# Altium PCB LEDBO_LTSN-N213EGBW.PcbDoc
Units mil, origin at the board's own origin, x right, y up, seen from the top; angles counter-clockwise.
Board outline 2460.63 x 2460.63 mil, 2 copper layers (Top Layer, Bottom Layer), stack 62.8 mil thick; 64 components, 101 nets, 290 pads, 171 vias.
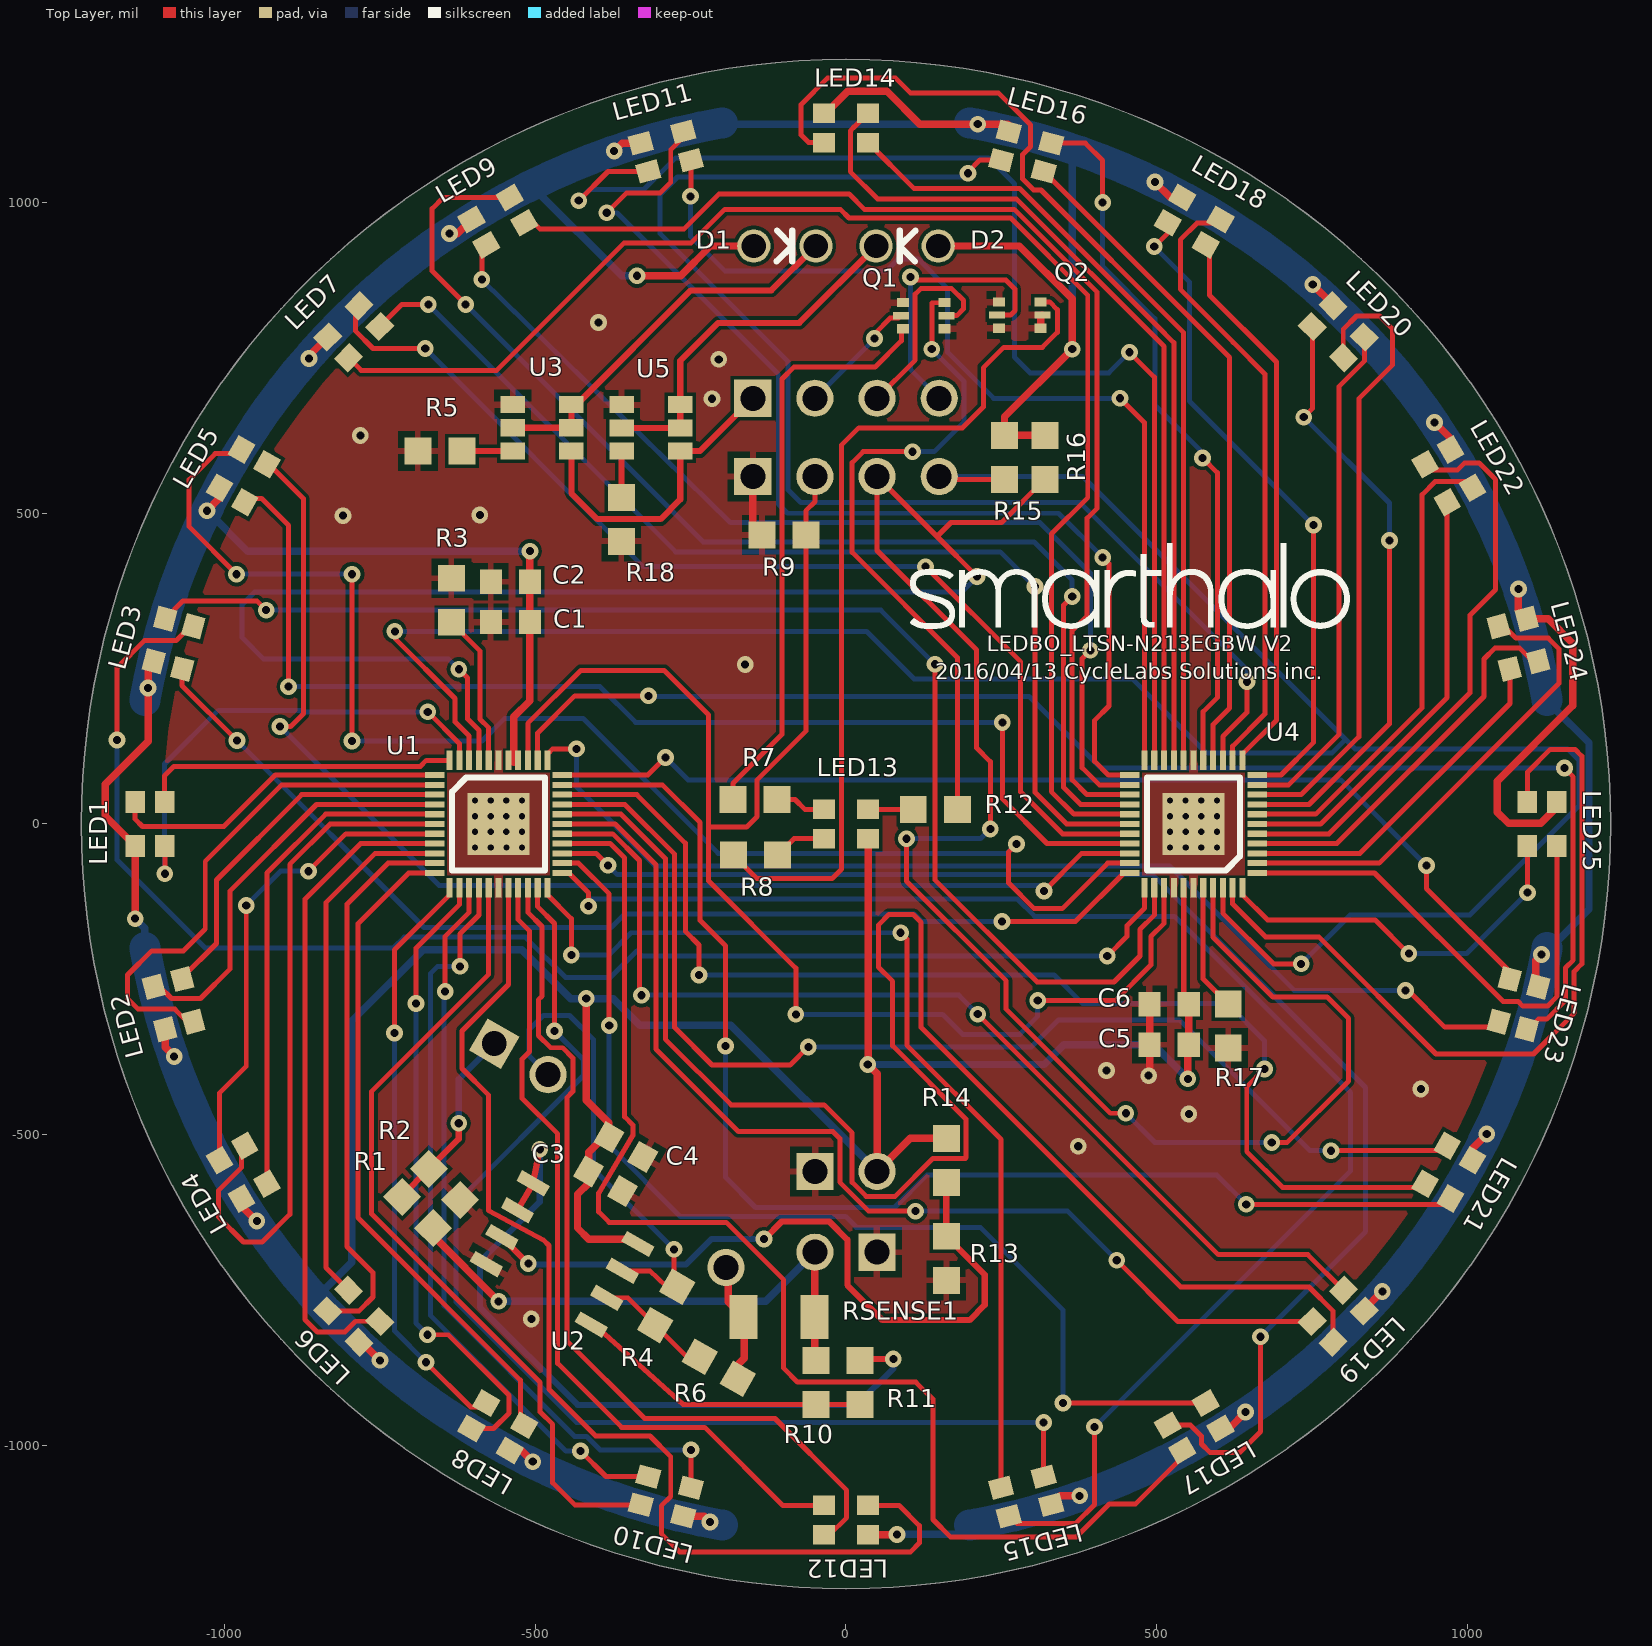
[diagram p0: Top Layer view]
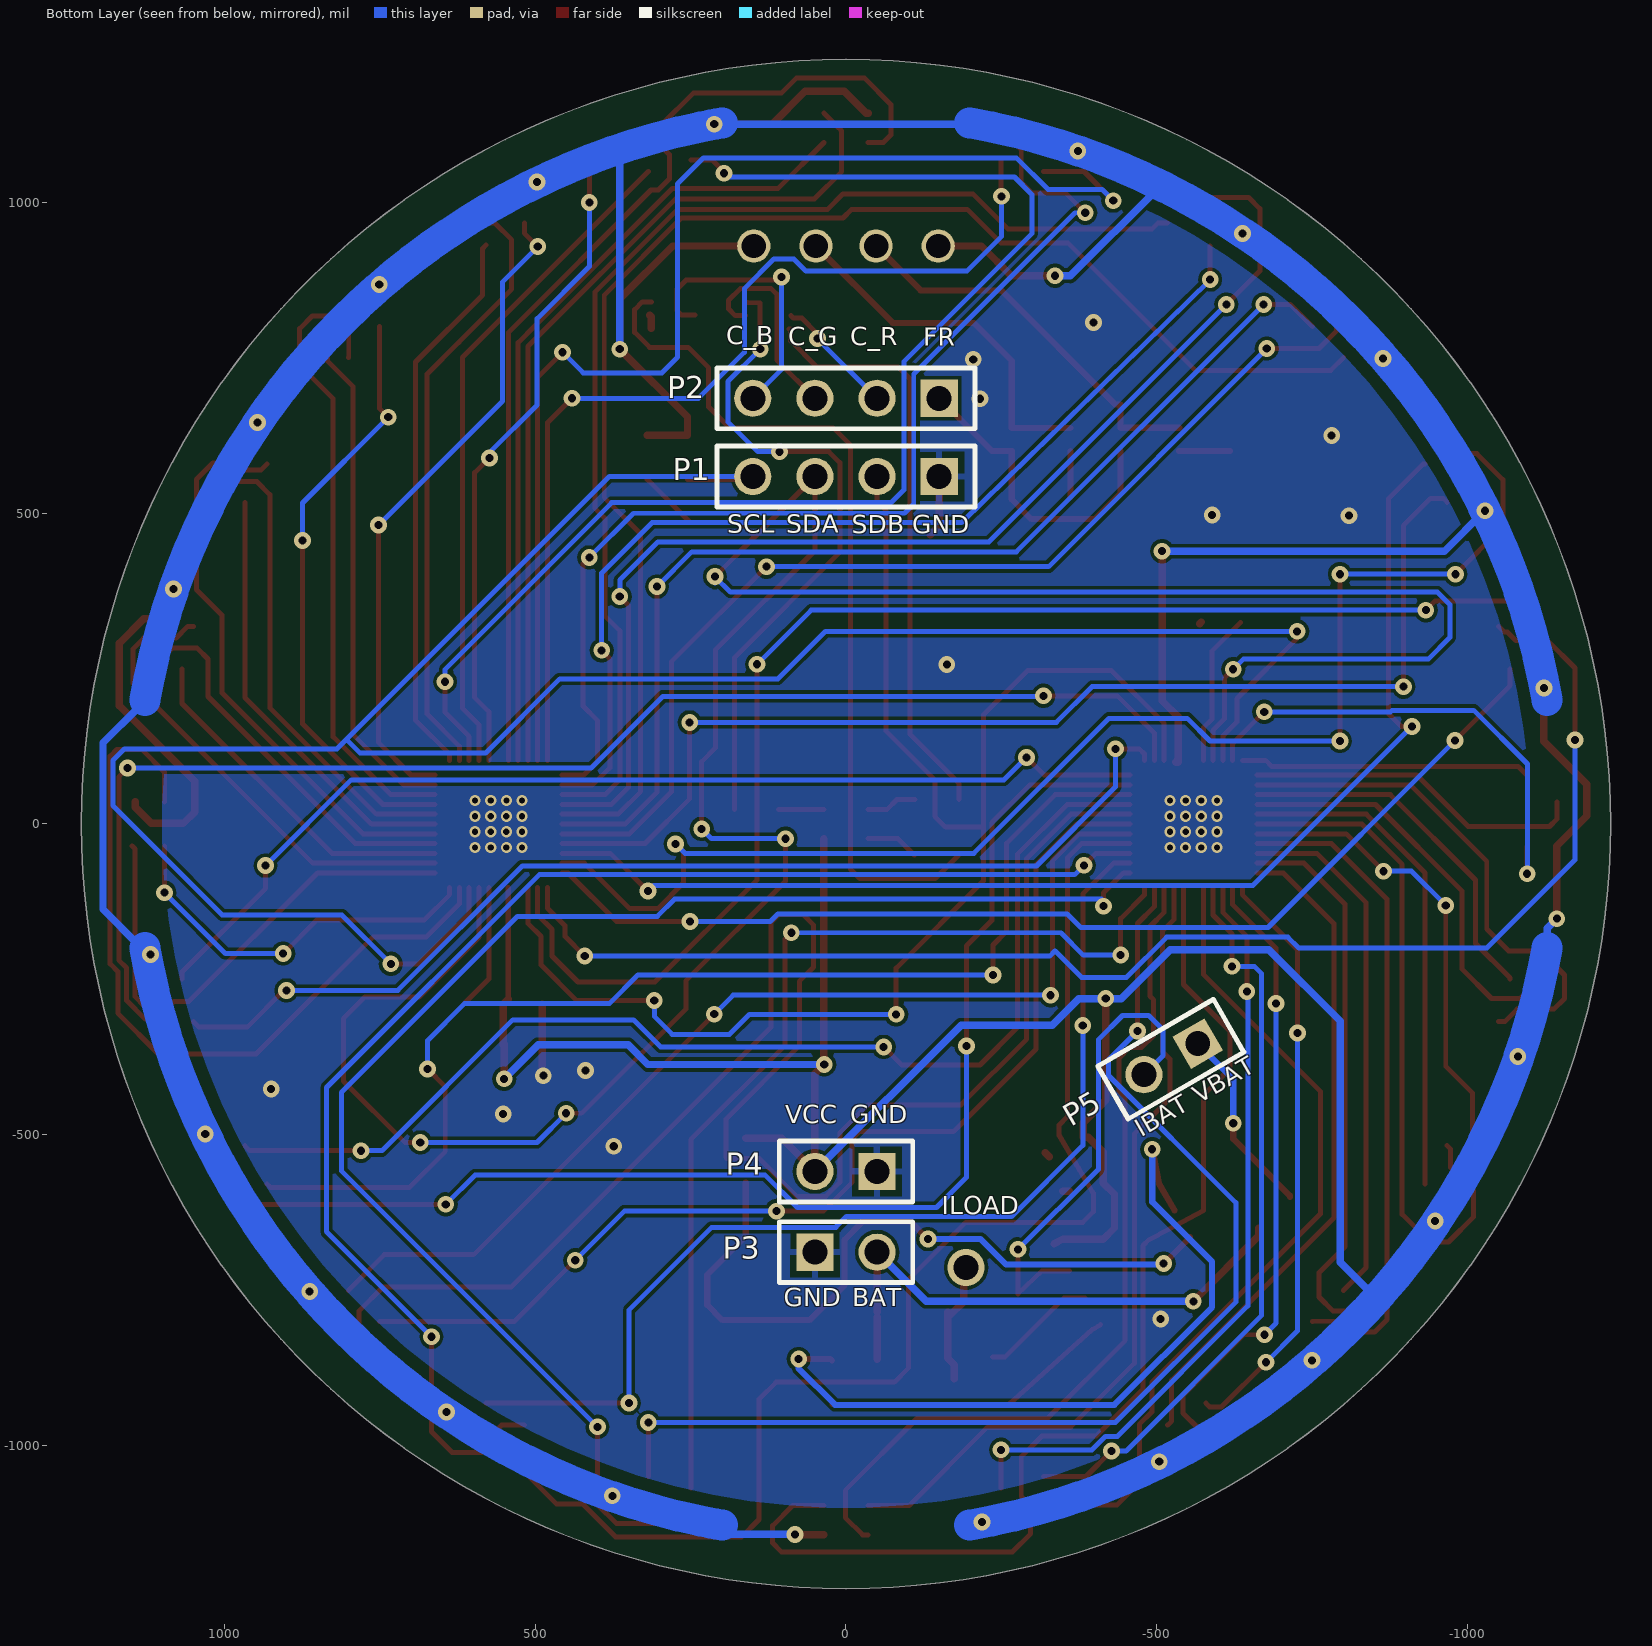
[diagram p1: Bottom Layer view, seen from below]

## Layer stack, top to bottom
Top Solder: solder mask 1, Solder Resist, Dk 3.5
Top Layer: signal copper 1.4
Dielectric 1: core 60, FR-4, Dk 4.2
Bottom Layer: signal copper 1.4
Bottom Solder: solder mask 1, Solder Resist, Dk 3.5

## Board outline
0,-1230.32 cw(c0,0) -1230.32,0 cw(c0,0) 0,1230.32 cw(c0,0) 1230.32,0 cw(c0,0)

## Design rules (kind name [scope] priority, off if disabled: settings)
AcuteAngle [All] p1: minimum=6.00000000000000E+0001 checktracksonly=FALSE
BoardOutlineClearance [All] p1: gap=15
Clearance Clearance_QFN [InComponent('U1') Or InComponent('U4')] p1: gap=4
Clearance [All] p2: gap=6
FanoutControl Fanout_LCC [IsLCC] p1: bgadir=Out bgaviamode=Centered fanoutstyle=Auto fanoutdirection=Alternating viagrid=1 // Fanout_LCC (Default Rule)
FanoutControl Fanout_BGA [IsBGA] p2: bgadir=Out bgaviamode=Centered fanoutstyle=Auto fanoutdirection=Alternating viagrid=1 // Fanout_BGA (Default Rule)
FanoutControl Fanout_Default [All] p4: bgadir=Out bgaviamode=Centered fanoutstyle=Auto fanoutdirection=Alternating viagrid=1 // Fanout_Default (Default Rule)
FanoutControl Fanout_Small [(CompPinCount < 5)] p5: bgadir=Out bgaviamode=Centered fanoutstyle=Auto fanoutdirection=OutThenIn viagrid=1 // Fanout_Small (Default Rule)
Height Height_TOP [OnLayer('Top Layer')] p2: minheight=0 maxheight=118.11 prefheight=39.37
Height Height_BOT [OnLayer('Bottom Layer')] p3: minheight=0 maxheight=787.4 prefheight=118.11
HoleSize [All] p1: absolutevalues=TRUE maxlimit=100 minlimit=10 maxpercent=80.000 minpercent=20.000
HoleToHoleClearance [All] p1: gap=6 allowstackedmicrovias=TRUE
MinimumAnnularRing [All] p1: minimumring=4
MinimumSolderMaskSliver [All] p1: minsoldermaskwidth=4
PolygonConnect PolygonConnect_Via_TP [IsVia Or (InComponent('U1') And IsPad) Or (InComponent('U4') And IsPad)] p1: connectstyle=Direct reliefconductorwidth=10 reliefentries=4 polygonreliefangle="90 Angle" airgapwidth=10
PolygonConnect [All] p2: connectstyle=Relief reliefconductorwidth=10 reliefentries=4 polygonreliefangle="90 Angle" airgapwidth=10
RoutingVias [All] p1: holewidth=13 width=27 viastyle="Through Hole" minholewidth=10 minwidth=18 maxholewidth=60 maxwidth=100
SilkToBoardRegionClearance SilkToBoardRegionClearance_1 [All] p2:
SolderMaskExpansion [All] p1: expansion=4
Width Width_VBAT [InNet('VBAT')] p1: maxlimit=50 minlimit=8 preferedwidth=12
Width Width_BATSENSE [InNet('BAT_SENSE')] p2: maxlimit=50 minlimit=8 preferedwidth=12
Width Width_VCC [InNet('VCC')] p3: maxlimit=50 minlimit=8 preferedwidth=12
Width Width_GND [InNet('GND')] p4: maxlimit=20 minlimit=8 preferedwidth=12
Width [All] p5: maxlimit=10 minlimit=6 preferedwidth=8
23 further rules are at their usual default settings.

## Classes and differential pairs
component class CENTRALLEDS: C3 C4 LED13 P3 P5 R1 R2 R4 R6 R10 R11 R13 R14 RSENSE1 U2
component class DRIVERS_CONNECTORS: C1 C2 C5 C6 D1 D2 P1 P2 P4 Q1 Q2 R3 R5 R7 R8 R9 R12 R15 R16 R17 R18 U1 U3 U4 U5
component class LEDS: LED1 LED2 LED3 LED4 LED5 LED6 LED7 LED8 LED9 LED10 LED11 LED12 LED14 LED15 LED16 LED17 LED18 LED19 LED20 LED21 LED22 LED23 LED24 LED25

## Components (designator, comment, footprint, x,y, rotation, side; value= is the part's Value field where it differs from the comment)
C1 "100.0nF" CAPC0603(1608)100_N -540,325 r180 top (schematic designator C4)
C2 "1.0uF" CAPC0603(1608)100_N -540,390 r180 top (schematic designator C3)
C3 "100.0nF" CAPC0603(1608)100_N -386.81,-574.8 r330 top (schematic designator C5)
C4 "1.0uF" CAPC0603(1608)100_N -354.33,-519.68 r330 top (schematic designator C6)
C5 "1.0uF" CAPC0603(1608)100_N 520,-355 r180 top (schematic designator C1)
C6 "100.0nF" CAPC0603(1608)100_N 520,-290 r180 top (schematic designator C2)
D1 "C503D-WAN-CDaEa232-0AH" FRONTLED_PADS -98.43,930 r0 top
D2 "C503D-WAN-CDaEa232-0AH" FRONTLED_PADS 98.43,930 r180 top
LED1 "LTSN-N213EGBW" LTSN-N213EGBW -1120.08,0 r0 top (schematic designator LED20)
LED2 "LTSN-N213EGBW" LTSN-N213EGBW -1081.91,-289.9 r15 top (schematic designator LED19)
LED3 "LTSN-N213EGBW" LTSN-N213EGBW -1081.91,289.9 r345 top (schematic designator LED21)
LED4 "LTSN-N213EGBW" LTSN-N213EGBW -970.02,-560.04 r30 top (schematic designator LED18)
LED5 "LTSN-N213EGBW" LTSN-N213EGBW -970.02,560.04 r330 top (schematic designator LED22)
LED6 "LTSN-N213EGBW" LTSN-N213EGBW -792.02,-792.02 r45 top (schematic designator LED17)
LED7 "LTSN-N213EGBW" LTSN-N213EGBW -792.02,792.02 r315 top (schematic designator LED23)
LED8 "LTSN-N213EGBW" LTSN-N213EGBW -560.04,-970.02 r60 top (schematic designator LED16)
LED9 "LTSN-N213EGBW" LTSN-N213EGBW -560.04,970.02 r300 top (schematic designator LED24)
LED10 "LTSN-N213EGBW" LTSN-N213EGBW -289.9,-1081.91 r75 top (schematic designator LED15)
LED11 "LTSN-N213EGBW" LTSN-N213EGBW -289.9,1081.91 r285 top (schematic designator LED25)
LED12 "LTSN-N213EGBW" LTSN-N213EGBW 0,-1120.08 r90 top (schematic designator LED14)
LED13 "LTSN-N213EGBW" LTSN-N213EGBW 0,0 r90 top (schematic designator LED1)
LED14 "LTSN-N213EGBW" LTSN-N213EGBW 0,1120.08 r270 top (schematic designator LED2)
LED15 "LTSN-N213EGBW" LTSN-N213EGBW 289.9,-1081.91 r105 top (schematic designator LED13)
LED16 "LTSN-N213EGBW" LTSN-N213EGBW 289.9,1081.91 r255 top (schematic designator LED3)
LED17 "LTSN-N213EGBW" LTSN-N213EGBW 560.04,-970.02 r120 top (schematic designator LED12)
LED18 "LTSN-N213EGBW" LTSN-N213EGBW 560.04,970.02 r240 top (schematic designator LED4)
LED19 "LTSN-N213EGBW" LTSN-N213EGBW 792.02,-792.02 r135 top (schematic designator LED11)
LED20 "LTSN-N213EGBW" LTSN-N213EGBW 792.02,792.02 r225 top (schematic designator LED5)
LED21 "LTSN-N213EGBW" LTSN-N213EGBW 970.02,-560.04 r150 top (schematic designator LED10)
LED22 "LTSN-N213EGBW" LTSN-N213EGBW 970.02,560.04 r210 top (schematic designator LED6)
LED23 "LTSN-N213EGBW" LTSN-N213EGBW 1081.91,-289.9 r165 top (schematic designator LED9)
LED24 "LTSN-N213EGBW" LTSN-N213EGBW 1081.91,289.9 r195 top (schematic designator LED7)
LED25 "LTSN-N213EGBW" LTSN-N213EGBW 1120.08,0 r180 top (schematic designator LED8)
P1 "MTLW-104-07-L-S-125" SMTC-MTLW-104-07-X-S-125 -150,559.05 r0 bottom locked
P2 "MTLW-104-07-L-S-125" SMTC-MTLW-104-07-X-S-125 -150,685 r0 bottom locked
P3 "MTLW-102-05-G-S-172" SMTC-MTLW-102-05-X-S-172 50,-688.98 r180 bottom locked
P4 "MTLW-102-05-G-S-172" SMTC-MTLW-102-05-X-S-172 -50,-559.05 r0 bottom locked
P5 "MTLW-102-05-G-S-172" SMTC-MTLW-102-05-X-S-172 -565.95,-353.35 r330 bottom locked
Q1 "NX3020NAKV" SOT666 125,817.91 r0 top
Q2 "NX3020NAKV" SOT666 279.53,818.9 r0 top
R1 "100kOhm" RESC0603(1608)_M -689.3,-625.2 r315 top (schematic designator R9)
R2 "300kOhm" RESC0603(1608)_M -646.1,-579.9 r135 top (schematic designator R10)
R3 "3.3 kOhm" RESC0603(1608)_M -635,360 r90 top (schematic designator R2)
R4 "1.1MOhm" RESC0603(1608)_M -289.37,-775.59 r240 top (schematic designator R17)
R5 "68 Ohm" RESC0603(1608)_M -653.5,600.3 r0 top (schematic designator R8)
R6 "10kOhm" RESC0603(1608)_M -204.72,-875 r330 top (schematic designator R16)
R7 "62 Ohm" RESC0603(1608)_M -146.65,39.37 r0 top (schematic designator R4)
R8 "62 Ohm" RESC0603(1608)_M -145.67,-50.2 r0 top (schematic designator R7)
R9 "100 kOhm" RESC0603(1608)_M -100,465 r0 top (schematic designator R11)
R10 "10kOhm" RESC0603(1608)_M -48.23,-898.62 r90 top (schematic designator R15)
R11 "1.1MOhm" RESC0603(1608)_M 22.64,-898.62 r90 top (schematic designator R14)
R12 "130 Ohm" RESC0603(1608)_M 143.7,23.62 r180 top (schematic designator R6)
R13 "100kOhm" RESC0603(1608)_M 161.42,-698.82 r90 top
R14 "100kOhm" RESC0603(1608)_M 161.42,-541.34 r90 top (schematic designator R12)
R15 "4.7 kOhm" RESC0603(1608)_M 255,590 r90 top (schematic designator R3)
R16 "4.7 kOhm" RESC0603(1608)_M 320,590 r90 top (schematic designator R5)
R17 "3.3 kOhm" RESC0603(1608)_M 615,-325 r270 top (schematic designator R1)
R18 "68 Ohm" RESC0603(1608)_M -361.5,490.2 r90 top
RSENSE1 "0.01 Ohm" RESC1206(3216)_N -107.6,-793.2 r0 top
U1 "IS31FL3236-QFLS2-TR" QFN-44 -559.05,0 r0 top locked
U2 "TSV358AIDT" "SOP8 - ST" -456.69,-691.93 r330 top locked
U3 "IS31LT3171" SOT23-6 -489,637.6 r90 top
U4 "IS31FL3236-QFLS2-TR" QFN-44 559.05,0 r180 top locked
U5 "IS31LT3171" SOT23-6 -313.8,637.4 r90 top

## Footprints (in the part's own frame and the unit in brackets; to place one, negate y for a bottom-side part, rotate by r counter-clockwise, add the part's x,y. Pads: shape width x height; smd on the part's side, far side on the other; paste and mask are expansions set on the pad)
CAPC0603(1608)100_N [mm] "Chip Capacitor, Body 1.6x0.8mm, Height 1.0mm, IPC Medium Density"
  rect 0.9x1 smd: 1(-0.8,0) 2(0.8,0)
  body extent -0.87,-0.48 0.88,0.47, height 1
FRONTLED_PADS [mm] "Front Led pads"
  round 1.36 hole 1: 1(-1.27,0) 2(1.27,0)
  silkscreen extent -0.34,-0.64 0.3,0.64
LTSN-N213EGBW [mm] "SMD LED LiteOn LTSN-N213EGBW, 2.1 x 2.1 mm, 1.2 x 1.8mm pitch"
  rect 0.8x0.9 smd: 1(-0.6,-0.9) 2(0.6,-0.9) 3(0.6,0.9) 4(-0.6,0.9)
  body extent -1.05,-1.05 1.05,1.05, height 1
QFN-44 [mm] "QFN-44, 5 x 5 x 0.8 mm body, 0.25 x 0.8 mm pads, 0.4 pin pitch, 2.55 x 2.55 mm thermal pad"
  rect 0.8x0.25 smd mask+0: 1(-2.6,2) 2(-2.6,1.6) 3(-2.6,1.2) 4(-2.6,0.8) 5(-2.6,0.4) 6(-2.6,0) 7(-2.6,-0.4) 8(-2.6,-0.8) 9(-2.6,-1.2) 10(-2.6,-1.6) 11(-2.6,-2) 23(2.6,-2) 24(2.6,-1.6) 25(2.6,-1.2) 26(2.6,-0.8) 27(2.6,-0.4) 28(2.6,0) 29(2.6,0.4) 30(2.6,0.8) 31(2.6,1.2) 32(2.6,1.6) 33(2.6,2)
  rect 0.25x0.8 smd mask+0: 12(-2,-2.6) 13(-1.6,-2.6) 14(-1.2,-2.6) 15(-0.8,-2.6) 16(-0.4,-2.6) 17(0,-2.6) 18(0.4,-2.6) 19(0.8,-2.6) 20(1.2,-2.6) 21(1.6,-2.6) 22(2,-2.6) 34(2,2.6) 35(1.6,2.6) 36(1.2,2.6) 37(0.8,2.6) 38(0.4,2.6) 39(0,2.6) 40(-0.4,2.6) 41(-0.8,2.6) 42(-1.2,2.6) 43(-1.6,2.6) 44(-2,2.6)
  rect 2.55x2.55 smd: 45(0,0)
  silkscreen extent -1.9,-1.9 1.9,1.9, body extent -2.5,-2.5 2.5,2.5, height 0.8
RESC0603(1608)_M [mm] "Chip Resistor, Body 1.6x0.8mm, IPC Low Density"
  rect 1.1x1.1 smd: 1(-0.9,0) 2(0.9,0)
  body extent -0.85,-0.47 0.85,0.47, height 0.6
RESC1206(3216)_N [mm] "Chip Resistor, Body 3.2x1.6mm, IPC Medium Density"
  rect 1.15x1.8 smd: 1(-1.45,0) 2(1.45,0)
  body extent -1.67,-0.87 1.67,0.87, height 0.75
SMTC-MTLW-102-05-X-S-172 [mm] "Terminal Assembly, 1x2 Pins, Vertical, 2.54mm Pitch, Male"
  rect 1.52x1.52 hole 1.02: 1(0,0)
  round 1.52 hole 1.02: 2(2.54,0)
  silkscreen extent -1.46,-1.24 4,1.24
SMTC-MTLW-104-07-X-S-125 [mm] "Terminal Assembly, 1x4 Pins, Vertical, 2.54mm Pitch, Male"
  rect 1.52x1.52 hole 1.02: 1(0,0)
  round 1.52 hole 1.02: 2(2.54,0) 3(5.08,0) 4(7.62,0)
  silkscreen extent -1.46,-1.24 9.08,1.24, body extent -1.27,-1.24 8.89,1.24, height 4.7
"SOP8 - ST" [mm] "SOP8, 3.9 x 4.9 x 1.75 mm body, 1.27mm x 4.95 mm pitch"
  rect 1.3x0.5 smd: 1(-2.475,1.905) 2(-2.475,0.635) 3(-2.475,-0.635) 4(-2.475,-1.905) 5(2.475,-1.905) 6(2.475,-0.635) 7(2.475,0.635) 8(2.475,1.905)
  body extent -2.45,-1.9 2.45,1.9, height 1.75
SOT23-6 [mm] "SOT23-6 pins, 2.92 x 1.6 mm body, 0.7mm x 1mm pads, 0.95 x 2.4 mm pitch"
  rect 0.7x1 smd mask+0.051: 1(-0.95,-1.2) 2(0,-1.2) 3(0.95,-1.2) 4(0.95,1.2) 5(0,1.2) 6(-0.95,1.2)
  body extent -1.56,-0.9 1.56,0.9, height 1.35
SOT666 [mm] "SOT666, 1.3 x 1.7 x 0.6 mm body, 0.375 x 0.5 mm pads, 1.6 x 0.538 mm pitch"
  rect 0.5x0.375 smd mask+0.046: 1(-0.85,0.538) 3(-0.85,-0.538) 4(0.85,-0.538) 6(0.85,0.538)
  rect 0.65x0.3 smd mask+0.046: 2(-0.925,0) 5(0.925,0)
  body extent -0.65,-0.85 0.65,0.85, height 0.6

## Part data
C1 C2 C3 C4 C5 C6: library part CAP0603, "Chip Cap 0603 X7R 10%"
D1 D2: "Cree 5mm Round LED C503D-WAN-CDaEa232-0AH"
LED1 LED2 LED3 LED4 LED5 LED6 LED7 LED8 LED9 LED10 LED11 LED12 LED13 LED14 LED15 LED16 LED17 LED18 LED19 LED20 LED21 LED22 LED23 LED24 LED25: "LED SMD LTSN-N213EGBW"
P1 P2: library part SMTC-MTLW-104-07-X-S-125, "Low Profile .025\" SQ Post Header, Through-hole, Vertical, -55 to 125 degC, 2.54 mm Pitch, 4-Pin, Male, RoHS"
P3 P4 P5: library part SMTC-MTLW-102-05-X-S-172, "Low Profile .025\" SQ Post Header, Through-hole, Vertical, -55 to 125 degC, 2.54 mm Pitch, 2-Pin, Male, RoHS"
Q1 Q2: "30 V, 200 mA dual N-channel Trench MOSFET"
R1 R13 R14: library part CMP-1012-00090-1, "100K 0.063W 1%  0603 (1608 Metric)  SMD"
R2: library part CMP-1012-00090-1, "300K 0.063W 1% 0603 (1608 Metric)  SMD"
R3 R17: library part CMP-1012-00090-1, "3k3 0.1W 5% 0603 (1608 Metric)  SMD"
R4 R11: library part CMP-1012-00090-1, "1M1 1/16W 1% 0603 (1608 Metric)  SMD"
R5 R18: library part CMP-1012-00090-1, "68R 0.1W 5% 0603 (1608 Metric)  SMD"
R6 R10: library part CMP-1012-00090-1, "10K 1/16W 1% 0603 (1608 Metric)  SMD"
R7 R8: library part CMP-1012-00090-1, "62R 0.1W 5% 0603 (1608 Metric)  SMD"
R9: library part CMP-1012-00090-1, "100k 0.1W 5% 0603 (1608 Metric)  SMD"
R12: library part CMP-1012-00090-1, "130R 0.1W 5% 0603 (1608 Metric)  SMD"
R15 R16: library part CMP-1012-00090-1, "4K7 0.1W 5% 0603 (1608 Metric)  SMD"
RSENSE1: library part RES1206(3216)_N, "0R01 0.25 W 1%  1206 (3216 Metric)  SMD"
U1 U4: "IC 36 CHANNELS LED DRIVER"
U2: "IC OPAMP GP 1.4MHZ RRO 8SO"
U3 U5: "10-TO-150MA CONSTANT-CURRENT LED DRIVER"

## Via types
v1: diameter 27, hole 13, Top Layer to Bottom Layer, tented top, 137 vias
v2: diameter 18, hole 10, Top Layer to Bottom Layer, 32 vias
v3: diameter 59.84, hole 40.16, Top Layer to Bottom Layer, 1 vias
v4: diameter 27, hole 13, Top Layer to Bottom Layer, 1 vias

## Nets (pads, with @x,y where several pads share a name; then routed paths per layer and width w, separated by ;. In a path a pad name is that pad's centre, name@x,y a point inside that pad or via, vN(x,y) a via of type N, cw(c..) or ccw(c..) an arc to the next point about the centre after c; other vN are vias at no path point)
BAT_SENSE: P3.2 R1.2 R10.2 RSENSE1.2 | length 866.5
  Top Layer w12: R1.2 -664.24,-662.86 -559.1,-768 v1(-558.9,-768) ; R10.2@-50.51,-860.9 RSENSE1.2 ; RSENSE1.2@-50,-784.64 P3.2
  Bottom Layer w12: v1(-558.9,-768) -129.02,-768 P3.2
CENTRAL_B: P2.4 Q2.2 | length 456.5
  Top Layer w8: v1(104,880) 108.58,875.42 257.08,875.42 272,860.5 272,825.9 265,818.9 Q2.2
  Bottom Layer w8: v1(104,880) 104,731 P2.4
CENTRAL_G: P2.3 Q1.5 | length 327.8
  Top Layer w8: P2.3 111.38,746.38 111.38,852.5 120.3,861.42 170.08,861.42 189,842.5 189,828.91 178,817.91 Q1.5
CENTRAL_R: P2.2 Q1.2 | length 198.3
  Top Layer w8: v1(46,781) 46,789 71.11,814.11 84.78,814.11 Q1.2
  Bottom Layer w8: P2.2 v1(46,781)
FRONTLED: P2.1 U3.1 U5.1 | length 502.8
  Top Layer w10: U3.1 -441.76,532.46 -399.9,490.6 -298.31,490.6 -266.56,522.36 U5.1 -235,600 P2.1
GND: C1.2 C2.2 C3.2 C4.2 C5.2 C6.2 P1.1 P3.1 P4.1 Q1.1 Q1.4 Q2.1 Q2.3 Q2.4 Q2.5 R2.1 R3.2 R5.1 R9.1 R13.1 R17.2 R18.1 U1.17 U1.39 U1.45 U2.4 U3.4 U4.17 U4.37 U4.39 U4.45 U5.4 | length 268.7
  Top Layer w12: C1.2 C1.2@-569.06,322.56 ; C3.2 C3.2@-348.55,-590.55 ; C4.2 C4.2@-320.62,-529 ; P1.1 -150,479.57 R9.1 ; P3.1@45.05,-684.02 P3.1 ; Q2.4 312.99,815.95 Q2.5 ; v1(487,-405) 488.5,-403.5 C6.2
  other v1: -506.3,-796.3 373.7,-518.5 551.6,-466.8 924.9,-426.5 419.2,-396.5 -162.2,256.8 -809.4,496.1 -589.2,497.1 -781.5,625.3 -215.7,684.2 -204.8,747.7 -398.2,806.8
  other v2: -596.77,-37.72 -571.63,-37.72 -546.48,-37.72 -521.34,-37.72 521.34,-37.72 546.5,-37.72 571.61,-37.72 596.77,-37.72 -596.77,-12.56 -571.61,-12.56 -546.5,-12.56 -521.34,-12.56 521.34,-12.56 546.5,-12.56 571.61,-12.56 596.77,-12.56 -596.77,12.56 -571.61,12.56 -546.5,12.56 -521.34,12.56 521.34,12.56 546.5,12.56 571.61,12.56 596.77,12.56 -596.77,37.72 -571.61,37.72 -546.5,37.72 -521.34,37.72 521.34,37.72 546.48,37.72 571.63,37.72 596.77,37.72
NetD1_2: D1.2 U3.2 U3.3 U3.5 | length 630.8
  Top Layer w10: U3.5 U3.2 U3.3 -433,675 -249.5,858.5 -119.93,858.5 D1.2
NetD2_2: D2.2 U5.2 U5.3 U5.5 | length 593.9
  Top Layer w10: U5.5 U5.2 U5.3 -266.56,745.34 -205.7,806.2 -75.37,806.2 D2.2
NetLED1_2: LED1.2 U1.43 | length 781
  Top Layer w8: LED1.2 -1096,-35.89 v1(-1096,-80) ; v1(-673,180.5) -622.05,129.55 U1.43
  Bottom Layer w8: v1(-1096,-80) -1096.46,-79.54 -1096.46,96.54 -1010,183 -878.8,183 -876.3,180.5 v1(-673,180.5)
NetLED1_3: LED1.3 U1.44 | length 511
  Top Layer w8: LED1.3 -1096.46,77.5 -1081.22,92.74 -684.76,92.74 -675.14,102.36 U1.44
NetLED1_4: LED1.4 U1.1 | length 549.1
  Top Layer w8: LED1.4 -1143.7,7.7 -1132,-4 -1001,-4 -918.26,78.74 U1.1
NetLED2_2: LED2.2 U1.2 | length 844.6
  Top Layer w8: LED2.2 -1059.99,-318.01 -1080,-298 -1139,-298 -1156,-281 -1156,-243 -1117,-204 -1066,-204 -1031,-169 -1031,-60 -908.01,62.99 U1.2
NetLED2_3: LED2.3 U1.3 | length 590.9
  Top Layer w8: LED2.3 -1068.27,-247.66 -1013,-192.39 -1013,-90 -875.76,47.24 U1.3
NetLED2_4: LED2.4 U1.4 | length 663.2
  Top Layer w8: LED2.4 -1104.21,-261.79 -1085.25,-280.75 -1038.75,-280.75 -991,-233 -991,-107.5 -852,31.5 U1.4
NetLED3_2: LED3.2 U4.33 | length 1759.8
  Top Layer w8: LED3.2 -1068.27,222.66 v1(-980.11,134.5) ; v1(251,-157) 369.1,-157 447.36,-78.74 U4.33
  Bottom Layer w8: v1(-980.11,134.5) -679.11,-166.5 -377.7,-166.5 -355.7,-144.5 109.5,-144.5 122,-157 v1(251,-157)
NetLED3_3: LED3.3 U4.34 | length 2302.2
  Top Layer w8: v1(-1173,135) -1173,251 -1129,295 -1078,295 -1064,309 -1058.94,309 LED3.3 ; v1(420.3,-212.6) 452.2,-180.7 452.2,-163.5 480.31,-135.39 U4.34
  Bottom Layer w8: v1(-1173,135) -1173,-57.6 -1031.1,-199.5 -728.5,-199.5 -711,-182 -516,-182 -451,-247 -379.2,-247 -336.2,-204 -327.6,-212.6 v1(420.3,-212.6)
NetLED3_4: LED3.4 U4.35 | length 2174.7
  Top Layer w8: LED3.4 -1066.8,359 -948,359 v1(-933,344) ; v1(143,257) 143,-89.8 307.5,-254.3 431.3,-254.3 473.1,-212.5 473.1,-169.6 496.06,-146.64 U4.35
  Bottom Layer w8: v1(-933,344) 56,344 v1(143,257)
NetLED4_2: LED4.2 U1.5 | length 809.7
  Top Layer w8: LED4.2 -931.84,-78.84 -837.25,15.75 U1.5
NetLED4_3: LED4.3 U1.6 | length 1105.9
  Top Layer w8: LED4.3 -973,-523.27 -973,-553 -1010,-590 -1010,-632 -969.5,-672.5 -939.5,-672.5 -895,-628 -895,-65 -830,0 U1.6
NetLED4_4: LED4.4 U1.7 | length 779.4
  Top Layer w8: LED4.4 -1008.19,-433.19 -965,-390 v1(-965,-131) ; v1(-865,-76) -804.75,-15.75 U1.7
  Bottom Layer w8: v1(-965,-131) -910,-76 v1(-865,-76)
NetLED5_2: LED5.2 U4.30 | length 1880.9
  Top Layer w8: LED5.2 -960.82,524 -940.39,524 -897,480.61 v1(-897,221) ; v1(251.5,163.5) 251.5,40.5 323.5,-31.5 U4.30
  Bottom Layer w8: v1(-897,221) -395.9,221 -338.4,163.5 v1(251.5,163.5)
NetLED5_3: LED5.3 U4.31 | length 1975.9
  Top Layer w8: LED5.3 -928.44,578.91 -873,523.48 -873,177.5 -893.5,157 v1(-910.5,157) ; v1(318.5,-108) 379.26,-47.24 U4.31
  Bottom Layer w8: v1(-910.5,157) -654.5,-99 309.5,-99 v1(318.5,-108)
NetLED5_4: LED5.4 U4.32 | length 2233.6
  Top Layer w8: v1(-980.6,401.9) -1057,478.3 -1057,554 -1015,596 -979.29,596 LED5.4 ; v1(-794.7,133.5) v1(-794.7,401.9) ; v1(274.3,-32) 261.6,-44.7 261.6,-95 302.8,-136.2 347.9,-136.2 421.11,-62.99 U4.32
  Bottom Layer w8: v1(-980.6,401.9) v1(-794.7,401.9) ; v1(-794.7,133.5) -585.6,133.5 -549,170.1 -423.1,170.1 -205.8,-47.2 259.1,-47.2 v1(274.3,-32)
NetLED6_2: LED6.2 U1.8 | length 1058.3
  Top Layer w8: LED6.2 -750.51,-800.11 -789.2,-800.11 -806.41,-817.33 -850.67,-817.33 -870.5,-797.5 -870.5,-121 -781,-31.5 U1.8
NetLED6_3: LED6.3 U1.9 | length 847.3
  Top Layer w8: LED6.3 -837,-713.62 -837,-126.6 -757.64,-47.24 U1.9
NetLED6_4: LED6.4 U1.10 | length 900.8
  Top Layer w8: LED6.4 -833.77,-783.92 -783.92,-783.92 -761,-761 -761,-722 -803,-680 -803,-129 -736.99,-62.99 U1.10
NetLED7_2: LED7.2 U4.27 | length 2326.6
  Top Layer w8: LED7.2 -780.11,730 -562,730 -357,935 -249,935 -195,989 -9,989 4.9,975.1 264.9,975.1 389,851 389,525 330.5,466.5 330.5,52 366.75,15.75 U4.27
NetLED7_3: LED7.3 U4.28 | length 1761.9
  Top Layer w8: LED7.3 -714.62,836 v1(-672,836) ; v1(304,382) 304,51 355,0 U4.28
  Bottom Layer w8: v1(-672,836) -274,438 248,438 v1(304,382)
NetLED7_4: LED7.4 U4.29 | length 1746.4
  Top Layer w8: LED7.4 -789,828.44 -789,793 -761,765 v1(-677,765) ; v1(128,414) 281,261 281,51.5 348.25,-15.75 U4.29
  Bottom Layer w8: v1(-677,765) -326,414 v1(128,414)
NetLED8_2: LED8.2 U1.11 | length 1075.6
  Top Layer w8: U1.11 -703.74,-78.74 -785.3,-160.3 -785.3,-633.55 -524,-894.85 -524,-960.82 LED8.2
NetLED8_3: LED8.3 U1.12 | length 950.8
  Top Layer w8: v1(-726.6,-336.1) -726.6,-202.4 -637.8,-113.6 U1.12 ; v1(-676,-866) -604,-938 -585.07,-938 LED8.3
  Bottom Layer w8: v1(-726.6,-336.1) -726.6,-815.4 v1(-676,-866)
NetLED8_4: LED8.4 U1.13 | length 1029
  Top Layer w8: v1(-691.9,-289) -691.9,-199.8 -622.05,-129.95 U1.13 ; v1(-673.4,-821.8) -639.8,-821.8 -542,-919.6 -542,-947.63 -567.13,-972.76 LED8.4
  Bottom Layer w8: v1@-691.9,-286.9 -691.9,-803.3 v1(-673.4,-821.8)
NetLED9_2: LED9.2 U4.24 | length 1632.7
  Top Layer w8: v1(-585.91,875.91) LED9.2@-585.91,929.84 ; v1(393.1,279.4) 380.06,266.36 380.06,90.44 407.51,62.99 U4.24
  Bottom Layer w8: v1(-585.91,875.91) -186,485 312,485 393.1,403.9 v1(393.1,279.4)
NetLED9_3: LED9.3 U4.25 | length 1918.8
  Top Layer w8: LED9.3 -502.28,967.28 -492,957 -261,957 -204,1014 4.73,1014 29.63,989.1 270.7,989.1 404,855.8 404,508 388,492 388,335 364,311 364,71 387.76,47.24 U4.25
NetLED9_4: LED9.4 U4.26 | length 1925.6
  Top Layer w8: v1(-612,836) -665.81,889.81 -665.81,990 -647.62,1008.19 LED9.4 ; v1(364,366) 350,352 350,59 377.5,31.5 U4.26
  Bottom Layer w8: v1(-612,836) -230,454 302.5,454 364,392.5 v1(364,366)
NetLED10_2: LED10.2 U1.14 | length 1244
  Top Layer w8: v1(-644.9,-269.7) -644.9,-180.84 -606.3,-142.24 U1.14 ; LED10.2 v1(-249.56,-1007)
  Bottom Layer w8: v1(-644.9,-269.7) -646.6,-271.4 -646.6,-775.4 -436.5,-985.5 -417.27,-985.5 -395.77,-1007 v1(-249.56,-1007)
NetLED10_3: LED10.3 U1.15 | length 1199.6
  Top Layer w8: v1(-621.1,-229) -621.1,-176.84 -590.55,-146.29 U1.15 ; v1(-427,-1009) -386.07,-1049.93 LED10.3
  Bottom Layer w8: v1(-621.1,-229) -657.1,-229 -668.4,-240.3 -668.4,-791 -450.4,-1009 v1(-427,-1009)
NetLED10_4: LED10.4 U1.16 | length 1312.7
  Top Layer w8: U1.16@-575.06,-102.36 -575.06,-241.96 -763.2,-430.1 -763.2,-627.4 -492,-898.6 -492,-946 -472,-966 -472,-1060 -436.44,-1095.56 LED10.4
NetLED11_2: LED11.2 U4.21 | length 2039.6
  Top Layer w8: v1(-430,1003) -383.07,1049.93 LED11.2 ; v1(456,759) 496.06,718.94 U4.21
  Bottom Layer w8: v1(-430,1003) -412.2,1020.8 -325.2,1020.8 -274.2,1071.8 229.3,1071.8 271,1030.1 271,751 296,726 423,726 v1(456,759)
NetLED11_3: LED11.3 U4.22 | length 1603.4
  Top Layer w8: v1(-250,1010) -250,1007.38 -249.56,1006.94 LED11.3 ; v1(441,685) 480.31,645.69 U4.22
  Bottom Layer w8: v1(-250,1010) -250,945 -194.48,889.48 64.48,889.48 84,909 116,909 163.65,861.35 163.65,758.85 237.5,685 v1(441,685)
NetLED11_4: LED11.4 U4.23 | length 1771
  Top Layer w8: v1(-385,983.5) -353.5,1015 -299.5,1015 -282,1032.5 -282,1085 -261.79,1105.21 LED11.4 ; v1(413,429) 423.1,418.9 423.1,189.9 400,166.8 400,100.8 422.06,78.74 U4.23
  Bottom Layer w8: v1(-385,983.5) -368.5,983.5 -109,724 -109,515 -94,500 342,500 v1(413,429)
NetLED12_2: LED12.2 U1.18 | length 1840.3
  Top Layer w8: U1.18@-543.06,-102.36 -543.06,-258.26 -617.9,-333.1 -617.9,-393.4 -575,-436.3 -575,-622 -486.53,-669.6 -478,-678.13 -478,-909.5 -402.81,-984.69 -315.31,-984.69 -282,-1018 -282,-1082 -297,-1097 -297,-1142 -268,-1171 104,-1171 118,-1157 118,-1129 85.46,-1096.46 LED12.2
NetLED12_3: LED12.3 U1.19 | length 1324.9
  Top Layer w8: U1.19 -527.56,-153.94 -509.06,-172.44 -509.06,-366.06 -521,-378 -521,-441.6 -464,-498.6 -464,-867.7 -361.01,-970.69 -227.31,-970.69 -101.54,-1096.46 LED12.3
NetLED12_4: LED12.4 U1.20 | length 1421.1
  Top Layer w8: U1.20 -511.81,-142.24 -489.06,-165 -489.06,-277.06 -495,-283 -495,-340.23 -475.23,-360 -456,-360 -439.42,-376.58 -439.42,-430.42 -449.27,-440.27 -449.27,-831.33 -323.91,-956.69 -114.31,-956.69 1,-1072 1,-1116 -26.7,-1143.7 LED12.4
NetLED13_2: LED13.2 R12.2 | length 72.8
  Top Layer w8: LED13.2 R12.2
NetLED13_3: LED13.3 R7.2 | length 82.3
  Top Layer w8: R7.2 -82,39.37 -66.25,23.62 LED13.3
NetLED13_4: LED13.4 R8.2 | length 85.8
  Top Layer w8: R8.2 -83.66,-23.62 LED13.4
NetLED14_2: LED14.2 U4.18 | length 1651.2
  Top Layer w8: LED14.2 -60,1096.46 -72.5,1108.96 -72.5,1157.5 -30,1200 80,1200 104,1176 245.64,1176 297,1124.64 297,1090 284,1077 284,1037.98 301.85,1020.13 313.87,1020.13 543.31,790.69 U4.18
NetLED14_3: LED14.3 U4.19 | length 1297.6
  Top Layer w8: LED14.3 108.99,1022.9 279.1,1022.9 500.39,801.61 527.56,774.44 U4.19
NetLED14_4: LED14.4 U4.20 | length 1393.4
  Top Layer w8: LED14.4 13.94,1122.21 13.58,1122.21 7.72,1116.35 7.72,1115.99 7,1115.27 7,1049.5 50.7,1005.8 274.2,1005.8 511.81,768.19 U4.20
NetLED15_2: LED15.2 U1.21 | length 1894.6
  Top Layer w8: U1.21 -496.06,-133.04 -469.06,-160.04 -469.06,-332.94 v1(-469,-333) ; LED15.2 v1(318.01,-963)
  Bottom Layer w8: v1(-469,-333) -422.5,-379.5 -422.5,-404.6 -627.2,-609.3 -627.2,-769.3 -433.5,-963 v1(318.01,-963)
NetLED15_3: LED15.3 U1.22 | length 1629.6
  Top Layer w8: U1.22 -480.31,-113.98 -442,-152.3 v1(-442,-211) ; v1(88,-175) 98,-185 98,-355.99 249.56,-507.55 LED15.3
  Bottom Layer w8: v1(-442,-211) -382,-211 -346,-175 v1(88,-175)
NetLED15_4: LED15.4 U1.23 | length 2430.7
  Top Layer w8: U1.23 -446.36,-78.74 -414.4,-110.7 v1(-414.4,-132.2) ; LED15.4 263.59,-1113.9 275.04,-1125.36 369.64,-1125.36 400,-1095 v1(400,-970)
  Bottom Layer w8: v1(-414.4,-132.2) -414.4,-124.2 -411.2,-121 276,-121 303.6,-148.6 528.6,-148.6 811.9,-431.9 811.9,-558.1 v1(400,-970)
NetLED16_2: LED16.2 U4.14 | length 2153.9
  Top Layer w8: v1(196.5,1047.1) 196.5,1049.5 215.27,1068.27 LED16.2 ; U4.14 606.3,140.7 645,179.4 v1(645,228.9)
  Bottom Layer w8: v1(196.5,1047.1) 190.4,1041 -271,1041 -299,1013 -299,950 -93,744 -93,537.5 -72.5,517 377,517 645,249 v1(645,228.9)
NetLED16_3: LED16.3 U4.15 | length 1082.4
  Top Layer w8: LED16.3 617.1,750.84 617.1,186.3 590.55,159.75 U4.15
NetLED16_4: LED16.4 U4.16 | length 1145.9
  Top Layer w8: LED16.4 385,1095.56 413,1067.56 v1(413,1000) ; v1(573.6,589.1) 597.4,565.3 597.4,203.4 574.8,180.8 U4.16
  Bottom Layer w8: v1(413,1000) 413,897 497,813 497,674.2 574.8,596.4 v1(573.6,589.1)
NetLED17_2: LED17.2 U1.24 | length 1752.9
  Top Layer w8: U1.24 -430.51,-62.99 -381,-112.5 v1(-381,-324) ; v1(349.34,-931.84) LED17.2
  Bottom Layer w8: -381,-356 v1(-381,-324) -381,-517 -266.5,-631.5 -0.63,-631.5 16.87,-649 ; 15.94,-649.05 216.05,-649.05 349.34,-782.34 v1(349.34,-931.84)
NetLED17_3: LED17.3 U1.25 | length 2261.3
  Top Layer w8: U1.25 -402.16,-47.24 v1(-382.9,-66.5) ; LED17.3 554.28,-967.28 572,-985 572,-997.5 585.5,-1011 633.9,-1011 667,-977.9 v1(667,-825)
  Bottom Layer w8: v1(-382.9,-66.5) -367.9,-81.5 493.5,-81.5 836,-424 836,-656 v1(667,-825)
NetLED17_4: LED17.4 U1.26 | length 2116.2
  Top Layer w8: U1.26 -379.4,-31.5 -356.1,-54.8 -356.1,-471.3 -343,-484.4 -343,-501 -398,-594 -398,-624 -381,-641 -192.7,-641 -100.3,-733.4 -100.3,-875.7 -78,-898 112.5,-898 140,-925.5 140,-1119 168,-1147 371,-1147 424,-1094 466,-1094 541.16,-1018.84 LED17.4
NetLED18_2: LED18.2 U4.11 | length 1063.5
  Top Layer w8: v1(496,929) 517.54,950.54 LED18.2 ; U4.11 699.84,78.74 752,130.9 v1(752,481)
  Bottom Layer w8: v1(496,929) 552.5,872.5 552.5,680.5 v1(752,481)
NetLED18_3: LED18.3 U4.12 | length 899.3
  Top Layer w8: LED18.3 585,925.76 585,850.91 692.6,743.31 692.6,166.9 637.8,112.1 U4.12
NetLED18_4: LED18.4 U4.13 | length 993.7
  Top Layer w8: LED18.4 596.78,967 565,967 538,940 538,860.47 623.06,775.41 623.06,774.94 674.1,723.9 674.1,177.3 622.05,125.25 U4.13
NetLED19_2: LED19.2 U1.27 | length 1686.4
  Top Layer w8: U1.27 -375.35,-15.75 -332.25,-58.85 -332.25,-272.35 v1(-329.1,-275.5) ; v1(212,-306) 599,-693 743.11,-693 LED19.2
  Bottom Layer w8: v1(-329.1,-275.5) 181.5,-275.5 v1(212,-306)
NetLED19_3: LED19.3 U1.28 | length 1753.5
  Top Layer w8: U1.28 -371.3,0 -305.6,-65.7 -305.6,-362.4 -173,-495 -21,-495 -10,-506 -10,-576.43 36.57,-623 v1(112,-623) ; v1(435.63,-702) 534,-800.37 LED19.3
  Bottom Layer w8: v1(112,-623) 356.63,-623 v1(435.63,-702)
NetLED19_4: LED19.4 U1.29 | length 2732.4
  Top Layer w8: U1.29 -361.95,15.75 -290.6,-55.6 -290.6,-346.3 -184.9,-452 -35,-452 10,-497 10,-576.63 32.37,-599 79,-599 140,-538 192.07,-538 193.07,-537 193.07,-475 75,-356.93 75,-253 52,-230 52,-162.7 69.3,-145.4 107.9,-145.4 121,-158.5 121,-327.5 538.5,-745 745,-745 783.92,-783.92 783.92,-833.77 LED19.4
NetLED20_2: LED20.2 U4.8 | length 968.9
  Top Layer w8: U4.8 744.9,31.5 874.5,161.1 v1(874.5,456.3) ; v1(736.5,654.6) 750.26,668.36 LED20.2
  Bottom Layer w8: v1(736.5,654.6) 874.5,516.6 v1(874.5,456.3)
NetLED20_3: LED20.3 U4.9 | length 1023.5
  Top Layer w8: U4.9 732.14,47.24 825.1,140.2 825.1,684.4 879.1,738.4 879.1,796.9 858.67,817.33 821.33,817.33 800.11,796.11 800.11,750.51 LED20.3
NetLED20_4: LED20.4 U4.10 | length 827.2
  Top Layer w8: U4.10 712.39,62.99 793,143.6 793,703.69 834.03,744.72 834.03,771.27 827.83,777.47 LED20.4@834.03,783.66
NetLED21_2: LED21.2 U1.30 | length 1881.9
  Top Layer w8: U1.30 -355.8,31.5 -275.8,-48.5 -275.8,-327.5 -215.5,-387.8 -89.8,-387.8 v1(-60.6,-358.6) ; v1(780.3,-525.7) 959.12,-525.7 LED21.2
  Bottom Layer w8: v1(-60.6,-358.6) 298.4,-358.6 342,-315 536,-315 746.7,-525.7 v1(780.3,-525.7)
NetLED21_3: LED21.3 U1.31 | length 1909.5
  Top Layer w8: U1.31 -336.64,47.24 -258.5,-30.9 -258.5,-172.8 -236.6,-194.7 v1(-236.6,-242.8) ; v1(673.5,-394) 644.8,-422.7 644.8,-527.1 702.7,-585 925.76,-585 LED21.3
  Bottom Layer w8: v1(-236.6,-242.8) 334.6,-242.8 380.8,-289 614,-289 673.5,-348.5 v1(673.5,-394)
NetLED21_4: LED21.4 U1.32 | length 2071.1
  Top Layer w8: U1.32 -295.39,62.99 -235,2.6 -235,-155 -193.7,-196.3 v1(-193.7,-357.3) ; v1(644,-612) 644.13,-612.13 963.16,-612.13 LED21.4 LED21.4@972.76,-607
  Bottom Layer w8: v1(-193.7,-357.3) -193.7,-568.8 -145.52,-616.98 78.02,-616.98 130,-565 597,-565 v1(644,-612)
NetLED22_2: LED22.2 U4.5 | length 929.9
  Top Layer w8: U4.5 777.19,-15.75 1004,211.06 1004,336 1045,377 1045,554.5 1018.5,581 995.33,581 983.65,569.32 941.44,569.32 LED22.2
NetLED22_3: LED22.3 U4.6 | length 704.2
  Top Layer w8: U4.6 763.76,0 967.28,203.52 LED22.3
NetLED22_4: LED22.4 U4.7 | length 769.6
  Top Layer w8: U4.7 755.75,15.75 927,187 927,529.96 947.8,550.76 998.6,550.76 LED22.4@999.36,550 ; LED22.4 LED22.4@1008.19,550
NetLED23_2: LED23.2 U1.33 | length 1712.8
  Top Layer w8: U1.33 -318.86,78.74 v1(-290.4,107.2) ; v1(934,-67) 934,-104 1068.27,-238.27 LED23.2
  Bottom Layer w8: v1(-290.4,107.2) -254.2,71 796,71 v1(934,-67)
NetLED23_3: LED23.3 U1.34 | length 1769.3
  Top Layer w8: U1.34 -480.31,112.69 -472.05,120.95 -472.1,121 v1(-433.5,121) ; v1(900.4,-267.7) 904.4,-267.7 963.6,-326.9 1041.04,-326.9 LED23.3
  Bottom Layer w8: v1(-433.5,121) -433.5,59.5 -306.5,-67.5 520.91,-67.5 721.11,-267.7 v1(900.4,-267.7)
NetLED23_4: LED23.4 U1.35 | length 2235.1
  Top Layer w8: U1.35 -496.06,146.48 -436.34,206.2 v1(-317.6,206.2) ; LED23.4 1106.8,-319 1109,-319 1114,-314 1127.44,-314 1157.7,-283.74 1157.7,-231.5 1170,-219.2 1170,76 v1(1156,90)
  Bottom Layer w8: v1(-317.6,206.2) -316.9,205.5 294.5,205.5 410,90 v1(1156,90)
NetLED24_2: LED24.2 U4.2 | length 773.3
  Top Layer w8: U4.2 858.01,-62.99 1147,226 1147,282 1130,299 1078,299 1058.99,318.01 LED24.2
NetLED24_3: LED24.3 U4.3 | length 562.4
  Top Layer w8: U4.3 827.07,-47.24 1068.27,193.96 LED24.3
NetLED24_4: LED24.4 U4.4 | length 629.4
  Top Layer w8: U4.4 789.8,-31.5 1026.52,205.22 1026.52,265.52 1044,283 1084,283 1105.21,261.79 LED24.4 LED24.4@1113.9,264.31
NetLED25_2: LED25.2 U4.43 | length 1277.2
  Top Layer w8: U4.43 622.05,-128.65 674.9,-181.5 760.7,-181.5 949.2,-370 1106.2,-370 1171.7,-304.5 1171.7,-237.3 1184,-225 1184,109.2 1173,120.2 1133.2,120.2 1096.46,83.46 LED25.2
NetLED25_3: LED25.3 U4.44 | length 624.9
  Top Layer w8: U4.44 637.8,-113.7 678.2,-154.1 851.2,-154.1 v1(905.6,-208.5) ; v1(1096.46,-110.54) LED25.3
  Bottom Layer w8: v1(905.6,-208.5) 998.5,-208.5 v1(1096.46,-110.54)
NetLED25_4: LED25.4 U4.1 | length 821.7
  Top Layer w8: U4.1 850.47,-78.74 1057.33,-285.6 1081.6,-285.6 1088.97,-292.97 1128.67,-292.97 1143.7,-277.95 1143.7,-40.24 LED25.4@1148.5,-35.43
NetP5_1: P5.1 R1.1 R2.2 | length 308.3
  Top Layer w10: R1.1 -714.35,-598.04 R2.2 -623.1,-506.79 v1(-623.1,-481.5)
  Bottom Layer w10: v1(-623.1,-481.5) -623.1,-410.5 P5.1
NetP5_2: P5.2 R4.1 U2.7 | length 775.6
  Top Layer w8: U2.7 -315.55,-719 -276.65,-756.04 v1(-276.65,-684.35)
  Bottom Layer w8: P5.2 -510,-372.69 -510,-331 -487,-308 -445,-308 -406,-347 -406,-556 v1(-276.65,-684.35)
NetQ1_3: Q1.3 R7.1 | length 948.7
  Top Layer w8: R7.1 -182.09,65.25 -103,144.34 -103,716 -84.01,734.99 46.65,734.99 89,777.34 89,796.73 Q1.3
NetQ1_6: Q1.6 R12.1 | length 1069.6
  Top Layer w8: v1(107,599) 27.5,599 10,581.5 10,437.13 179.13,268 R12.1 ; v1(138,764) 138,838.09 Q1.6
  Bottom Layer w8: v1(107,599) 142,599 190,647 190,712 v1(138,764) v1@137,765
NetQ2_6: Q2.6 R8.1 | length 1406.4
  Top Layer w8: R8.1 -143.3,-88 -22.5,-88 -7,-72.5 -7,610 20.5,637.5 187.5,637.5 221,671 221,734 254,767 316,767 340,791 340,827.68 327.61,840.08 Q2.6
NetR3_1: R3.1 U1.40 | length 247
  Top Layer w8: R3.1 -589.06,278.62 -589.06,169.05 -575.06,155.05 U1.40@-575.06,102.36
NetR4_2: R4.2 R6.1 U2.6 | length 188.7
  Top Layer w8: U2.6 -351.06,-762.3 R4.2 -256.08,-857.28 R6.1
NetR5_2: R5.2 U3.6 | length 81.8
  Top Layer w10: R5.2@-618.07,600.2 U3.6
NetR10_1: R10.1 R11.1 U2.5 | length 480.8
  Top Layer w8: U2.5 -396.17,-813.48 -261.95,-934.05 R10.1 R11.1
NetR11_2: R11.2 U2.1 U2.2 | length 1224.6
  Top Layer w10: U2.2 U2.1 v1(-492.7,-523.4) ; R11.2 25.03,-860.8 v1(76.2,-860.8)
  Bottom Layer w10: v1(-492.7,-523.4) -492.7,-607.6 -492.4,-607.9 -589,-704.5 -589,-777.3 -431.5,-934.8 17.6,-934.8 76.2,-876.2 v1(76.2,-860.8)
NetR13_2: R13.2 R14.1 U2.3 | length 1165.2
  Top Layer w10: U2.3 v1(-511.1,-707.34) ; v1(-131.8,-667.9) -103.5,-639.6 -27,-639.6 2.2,-668.8 2.2,-741.8 58.7,-798.3 198.9,-798.3 223.4,-773.8 223.4,-725.37 R13.2 R14.1
  Bottom Layer w10: v1(-511.1,-707.34) -509.59,-708.85 -257.55,-708.85 -216.6,-667.9 v1(-131.8,-667.9)
NetR17_1: R17.1 U4.40 | length 203.9
  Top Layer w8: U4.40 574.8,-249.37 R17.1
NetR18_2: R18.2 U5.6 | length 73.9
  Top Layer w10: R18.2@-361.04,526.09 U5.6
SCL: P1.4 R15.1 U1.42 U4.42 | length 4053.4
  Top Layer w8: v1(-726,310) -726,299 -629.06,202.06 -629.06,164.36 -606.3,141.6 U1.42 ; P1.4 150,554.57 R15.1 ; U4.42 606.3,-143.5 687.8,-225 v1(732.4,-225)
  Bottom Layer w8: v1(-726,310) 32.9,310 109.4,233.5 460.5,233.5 580,114 781.8,114 803.9,136.1 819,121 ; P1.4 380.94,559.06 819,121 ; v1(732.4,-225) 811.1,-146.3 1003.7,-146.3 1179.5,29.5 1179.5,102.5 1161,121 819,121
SDA: P1.3 R16.1 U1.41 U4.41 | length 4492
  Top Layer w8: v1(-623,249) -609.06,235.06 -609.06,169.25 -590.55,150.75 U1.41 ; v4(97.2,-23.7) 97.2,-91.6 257.8,-252.2 257.8,-297.9 425.3,-465.4 v1(450.2,-465.4) ; v1(211,398.06) 146.53,462.53 ; v1(232.2,-7.9) 232.2,100.3 209.9,122.6 209.9,280.2 50,440.1 P1.3 146.53,462.53 ; R16.1 250.43,485 169,485 146.53,462.53 ; U4.41 590.55,-182.05 686.9,-278.4 774.2,-278.4 808.5,-312.7 808.5,-413.7 709.9,-512.3 v1(685,-512.3)
  Bottom Layer w8: v1(-623,249) -639.2,265.2 -936.9,265.2 -971.7,300 -971.7,353.1 -951.5,373.3 186.24,373.3 v1(211,398.06) v1@211,387.5 ; v4(97.2,-23.7) 216.4,-23.7 v1(232.2,-7.9) ; v1(450.2,-465.4) 497.2,-512.4 497.3,-512.3 v1(685,-512.3)
SDB: P1.2 R9.2 U1.36 U4.36 | length 2404.5
  Top Layer w8: U1.36 -511.81,161.89 -426.7,247 -292.7,247 -221,175.3 -221,-5 ; v1(-80.7,-306.2) -80.7,-231.9 -221,-91.6 -221,-5 ; P1.2 -50,518.57 -64.57,504 -64.57,149.43 -143,71 -143,12 -160,-5 -221,-5 ; v1(308.5,-284.2) 433.4,-284.2 490.6,-227 490.6,-181.1 511.81,-159.89 U4.36
  Bottom Layer w8: v1(-80.7,-306.2) 155.3,-306.2 187.5,-338.4 279.6,-338.4 308.5,-309.5 v1(308.5,-284.2)
VBAT: R6.2 RSENSE1.1 | length 203.1
  Top Layer w12: v3(-193.2,-713.6) -189.2,-717.6 -189.2,-768.69 RSENSE1.1 ; R6.2 -174.04,-870.04 -163.39,-859.39 RSENSE1.1@-163.39,-785.43
VCC: C1.1 C2.1 C3.1 C4.1 C5.1 C6.1 D1.1 D2.1 LED1.1 LED2.1 LED3.1 LED4.1 LED5.1 LED6.1 LED7.1 LED8.1 LED9.1 LED10.1 LED11.1 LED12.1 LED13.1 LED14.1 LED15.1 LED16.1 LED17.1 LED18.1 LED19.1 LED20.1 LED21.1 LED22.1 LED23.1 LED24.1 LED25.1 P4.2 R14.2 R15.2 R16.2 U1.37 U1.38 U2.8 U4.38 | length 14822.9
  Top Layer w9: C6.1@543.31,-281.81 U4.38
  Top Layer w12: v1(-1143.7,-152.3) LED1.1 -1192,12.86 -1192,64 -1123,133 v1(-1123,219) -1123,261.79 LED3.1 ; LED2.1 -1095.56,-359.44 v1(-1081,-374) ; v1(-1028,504) -1008.19,523.81 LED5.1 ; LED4.1 -972.76,-614.24 v1(-948,-639) ; v1(-864,749) -864,753.44 LED7.1 ; LED6.1 -779.23,-833.77 v1(-750,-863) ; v1(-638,950) -625.29,950 LED9.1 ; LED8.1 -521.81,-1008.19 v1(-504,-1026) ; -533.28,102.36 -530.42,99.5 -534.7,99.5 -534.7,172.4 -508.5,198.6 C1.1 C2.1 v1(-508.5,439) ; v1(-418,-281) -418,-444.61 -381.61,-481 C4.1 -389.94,-503.94 -414.09,-528.09 -414.09,-578.09 -432,-596 -432,-650 -414.18,-667.82 -348.44,-667.82 U2.8 ; v1(-373,1083) -360.44,1095.56 LED11.1 ; v1(-336.4,882.2) -265.8,882.2 -218,930 D1.1 ; LED10.1 -228.1,-1113.9 v1(-219,-1123) ; LED14.1 -32.3,1143.7 3,1179 66,1179 119,1126 v1(212,1126) 260.37,1126 261.79,1124.59 LED16.1 ; LED12.1 v1@81.3,-1143.7 ; LED13.1 35.43,-387.43 50,-402 P4.2 103.15,-505.91 R14.2 ; D2.1 279,930 363,846 ; R16.2 R15.2 255,655 v1@360.5,760.5 ; LED15.1 344.8,-1081 v1(376,-1081) ; v1@357,764 v1@360.5,760.5 ; v1@363,758 v1@360.5,760.5 ; 364,845 v1(364,764) v1@360.5,760.5 ; v1(497,1033) 521.81,1008.19 LED18.1 ; C6.1@543.31,-281.81 C6.1 C5.1 550,-353.5 v1(550,-410) ; LED17.1 616.24,-972.76 v1(643,-946) ; v1(751,868) 783.66,835.34 LED20.1 ; LED19.1 833.77,-781.23 v1(863,-752) ; v1(947,646) 972.76,620.24 LED22.1 ; LED21.1 1008.19,-521.81 v1(1031,-499) ; v1(1082,378) 1082,343.8 LED24.1 1129.76,330.24 1169,291 1169,190 1048,69 1048,19 1066,1 1117.67,1 1143.7,27.04 LED25.1 ; LED23.1 1110,-257.89 1110,-219 v1(1119,-210)
  Bottom Layer w12: v1(-1143.7,-152.3) -1128.26,-167.74 -1128.26,-198.94 ; v1(-1028,504) -963,439 v1(-508.5,439) ; -836,-746 -795,-705 -795,-317 -680,-202 -522,-202 -443,-281 v1(-418,-281) -374.5,-281 -331.8,-323.7 -185.36,-323.7 P4.2 ; -561.19,-998.81 -534,-1026 v1(-504,-1026) ; -499.8,1020.8 -360.85,881.85 -360.5,882.2 v1(-336.4,882.2) ; -460,1035.5 -460,1053 ; -231.3,1116.77 -222.06,1126 -205.31,1126 ; -201.72,1126 v1(212,1126) ; v1(35,-387) 318.66,-387 350.66,-355 495,-355 v1(550,-410) ; v1(82,-1143) 184.21,-1143 ; 349,1081.57 364,1066.57 v1(364,764) ; 1138,-195 1195.5,-137.5 1195.5,130.5 1139,187
  Bottom Layer w50: -1128.26,-198.94 ccw(c0,0) -198.94,-1128.26 ; -1128.26,198.94 cw(c0,0) -198.94,1128.26 ; 218.6,-1124.62 cw(c0,0) 198.94,-1128.26 ccw(c0,0) 1128.26,-198.94 ; v1@218.6,1124.62 ccw(c0,0) 198.94,1128.26 cw(c0,0) 1128.26,198.94

## Polygon pours and split planes (outlines as drawn)
GND on Bottom Layer "Bot GND" (solid, remove dead copper, pour order 2): 0,-1100 cw(c0,0) -1100,0 cw(c0,0) 0,1100 cw(c0,0) 1100,0 cw(c0,0)
GND on Top Layer "Top GND" (solid, remove dead copper, pour order 4): 0,-1100 cw(c0,0) -1100,0 cw(c0,0) 0,1100 cw(c0,0) 1100,0 cw(c0,0)

## Keep-outs
Mechanical 3:
  circle w39.37: c0,0 r996.06

## Silkscreen, mask and mechanical layers (free items; w line width, h text height)
Top Overlay:
  drawing of 4068 lines, arcs and shapes, not listed
  text "LEDBO_LTSN-N213EGBW V2" at 226.3,277.6 h25
  text "2016/04/13 CycleLabs Solutions inc." at 143.3,233.3 h25
Bottom Overlay:
  text "C_B" at 193,762 h50
  text "C_R" at -7,761 h50
  text "C_G" at 93,761 h50
  text "FR" at -124,760 h50
  text "SDA" at 96,459 h50
  text "SCL" at 191,459 h50
  text "GND" at -107,458 h50
  text "SDB" at -9,458 h50
  text "VBAT" at -573,-459 h50 r330
  text "GND" at -7,-491 h50
  text "VCC" at 98,-491 h50
  text "IBAT" at -480,-513 h50 r330
  text "ILOAD" at -154.2,-637.9 h50
  text "BAT" at -10,-786 h50
  text "GND" at 100,-786 h50
Outline:
  circle w10: c0,0 r1230.32